# EAGLE board JogWe (EAGLE 7.6.0)
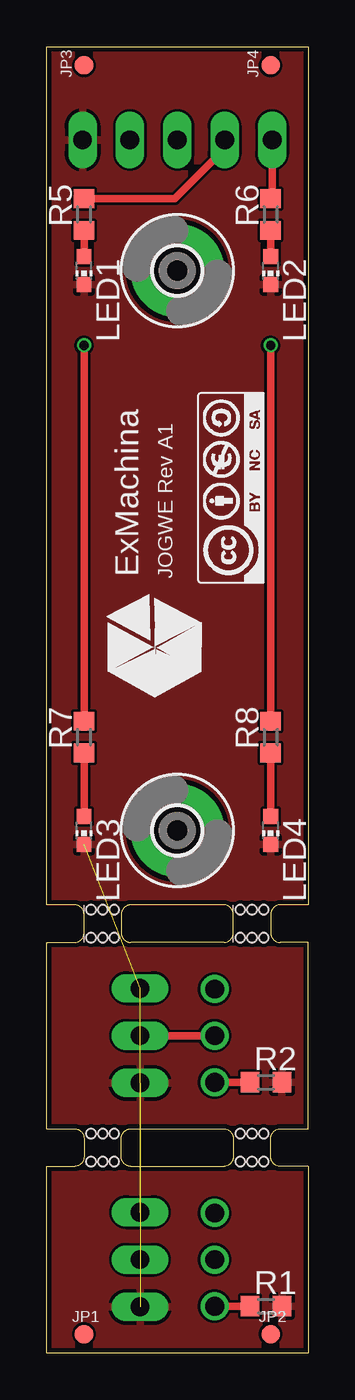
[diagram p0: board, top side]
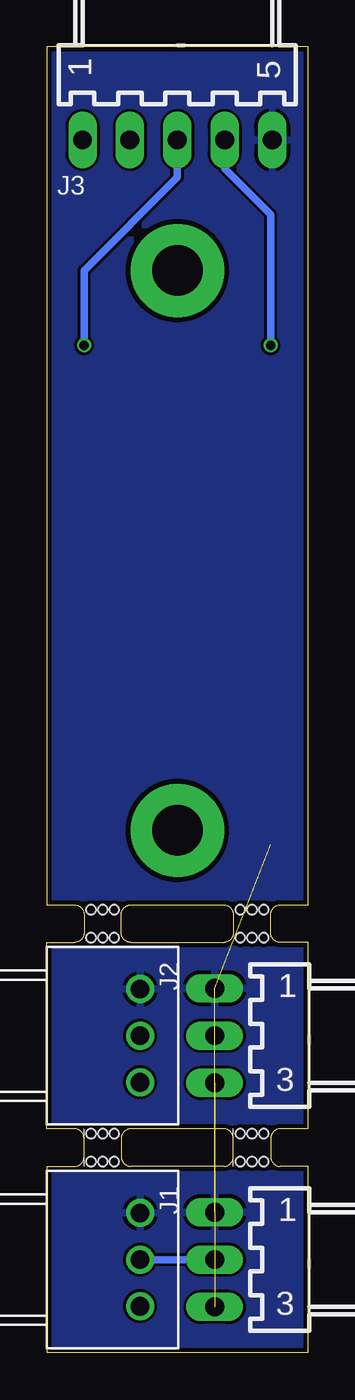
[diagram p1: board, bottom side, seen from below]

Size 14 x 70 mm. Coordinates in mm from the lower left corner, seen from the top.
Outline: 0,0 14,0 14,10 12.5,10 arc-90 12,10.5 12,11.5 arc-90 12.5,12 14,12 14,22 12.5,22 arc-90 12,22.5 12,23.5 arc-90 12.5,24 14,24 14,70 0,70 0,24 1.5,24 arc-90 2,23.5 2,22.5 arc-90 1.5,22 0,22 0,12 1.5,12 arc-90 2,11.5 2,10.5 arc-90 1.5,10 0,10 0,0
Outline: 4.5,24 arc90 4,23.5 4,22.5 arc90 4.5,22 9.5,22 arc90 10,22.5 10,23.5 arc90 9.5,24 4.5,24
Outline: 9.5,12 arc-90 10,11.5 10,10.5 arc-90 9.5,10 4.5,10 arc-90 4,10.5 4,11.5 arc-90 4.5,12 9.5,12
Copper layers (1*16): Top 0.018mm / dielectric 1.55mm / Bottom 0.018mm
Design rules "eC_2Layer_PClass6_BaseCopperO18_eCDefault": minimum track width 0.15mm, minimum drill 0.35mm, track to track 0.15mm, track to pad 0.15mm, pad to pad 0.15mm, via to via 0.15mm, smd to smd 0mil, copper to edge 0.25mm, drill to drill 0.35mm, minimum pad ring 0.175mm, minimum via ring 0.125mm, stop-mask expansion 0mil, vias tented up to drill 0.45mm, thermal gap 0.2mm
Holes 0.5 mm at 3,22.25 3,23.75 2.38,23.75 3.62,23.75 2.38,22.25 3.62,22.25 11,22.25 11,23.75 10.38,23.75 11.62,23.75 10.38,22.25 11.62,22.25 11,10.25 11,11.75 11.62,11.75 10.38,11.75 11.62,10.25 10.38,10.25 3,10.25 3,11.75 3.62,11.75 2.38,11.75 3.62,10.25 2.38,10.25

## Footprints (pad centres in the part's own frame; a part is rotated, then mirrored left to right if it is on the bottom)
7395-03 = drill 1.016 long: 1 2.54,0; 2 0,0; 3 -2.54,0
7395-05 = drill 1.016 long: 1 5.08,0; 2 2.54,0; 3 0,0; 4 -2.54,0; 5 -5.08,0
FIDUCIAL-1X2 = smd 1 x 1: 1 0,0
CHIP-LED0603 = smd 0.8 x 0.8: A 0,-0.75; C 0,0.75
P2.5 = drill 2.7 pad 5: 1 0,0
R0603 = smd 1 x 1.1: 1 -0.85,0; 2 0.85,0
RK097 = drill 1: 1 -5,-2.5; 2 -5,0; 3 -5,2.5

## Placement (x,y rotation side)
J1  22-05-7038-03  [7395-03]  5,5 90 bottom
J2  22-05-7038-03  [7395-03]  5,17 90 bottom
J3  22-05-7058-05  [7395-05]  7,65 180 bottom
JP1  FIDUCIAL1X2  [FIDUCIAL-1X2]  2,1 0 top
JP2  FIDUCIAL1X2  [FIDUCIAL-1X2]  12,1 0 top
JP3  FIDUCIAL1X2  [FIDUCIAL-1X2]  2,69 90 top
JP4  FIDUCIAL1X2  [FIDUCIAL-1X2]  12,69 90 top
LED1  [CHIP-LED0603]  2,58 180 top
LED2  [CHIP-LED0603]  12,58 180 top
LED3  [CHIP-LED0603]  2,28 180 top
LED4  [CHIP-LED0603]  12,28 180 top
MP1  MOUNT-PAD2.5  [P2.5]  7,28 270 top
MP2  MOUNT-PAD2.5  [P2.5]  7,58 270 top
R1  5.1k  [R0603]  11.75,2.5 0 top
R2  5.1k  [R0603]  11.75,14.5 0 top
R3  RK0971110D88  [RK097]  14,5 180 bottom
R4  RK0971110D88  [RK097]  14,17 180 bottom
R5  5.1k  [R0603]  2,61 90 top
R6  5.1k  [R0603]  12,61 90 top
R7  5.1k  [R0603]  2,33 90 top
R8  5.1k  [R0603]  12,33 90 top
U$1  EXMACHINA-LOGO-NAME  [EXM-LOGO-BASELINE]  5.81,37.81 90 top
U$2  CC-BY-NC-SA  [CC-BY-NC-SA]  9.89,46.35 90 top

## Library data of the parts
J1 J2 = con-molex; OC_FARNELL: 9731610; OC_NEWARK: unknown
J3 = con-molex; OC_FARNELL: unknown; OC_NEWARK: unknown
JP1-JP4 = SparkFun
LED1-LED4 = led
MP1 MP2 = holes
R1 R2 R5-R8 = rcl
R3 R4 = pot
U$1 = exmachina
U$2 = cc-by-sa

## Nets
+5V: J1.3 J2.3 R1.2 R2.2
GND: J1.1 J2.1 J3.5 LED1.C LED2.C LED3.C LED4.C R3.1 R4.1
JOGWHEEL_1: J1.2 R3.2
JOGWHEEL_2: J2.2 R4.2
N$1: R1.1 R3.3
N$2: R2.1 R4.3
N$3: LED1.A R5.1
N$4: LED2.A R6.1
N$5: LED3.A R7.1
N$6: LED4.A R8.1
N$7: J3.4 R7.2
N$8: J3.1 R6.2
N$9: J3.2 R5.2
N$10: J3.3 R8.2

## Tracks (layer width: path | path; a pad name or v marks a point on that pad's centre or on a via)
+5V  (1 unrouted)
  pour Top: -15,23 32,23 32,-4 -15,-4
GND  (2 unrouted)
  pour Bottom: -12,81 27,81 27,-5 -12,-5
  pour Top: -5,80 20,80 19,24 -6,24
JOGWHEEL_1
  Bottom 0.406: J1.2 R3.2
JOGWHEEL_2
  Top 0.406: J2.2 R4.2
N$1
  Top 0.406: R3.3 R1.1
N$2
  Top 0.406: R4.3 R2.1
N$3
  Top 0.406: LED1.A R5.1
N$4
  Top 0.406: R6.1 LED2.A
N$5
  Top 0.406: LED3.A R7.1
N$6
  Top 0.406: LED4.A R8.1
N$7  (via drill 0.5)
  Top 0.406: R7.2 v2,54
  Bottom 0.406: v2,54 2,61 4.46,63.46 J3.4
N$8
  Top 0.406: J3.1 12.08,61.93 R6.2
N$9
  Top 0.406: R5.2 6.85,61.85 9.54,64.54 J3.2
N$10  (via drill 0.5)
  Top 0.406: R8.2 v12,54
  Bottom 0.406: v12,54 12,58 7,63 J3.3

## Text on the board
tPlace: JOGWE Rev A1